# Altium PCB MB_v1.PcbDoc (part 7 of 10)
Units mm, origin at the board's own origin, x right, y up, seen from the top; angles counter-clockwise.
Board outline 203 x 72 mm, 6 copper layers (Top Layer, Layer 3, Layer 1, Layer 2, Layer 4, Bottom Layer), stack 1.52 mm thick; 655 components, 569 nets, 2943 pads, 1834 vias.
Unrouted connection lines stored in the file: 31.
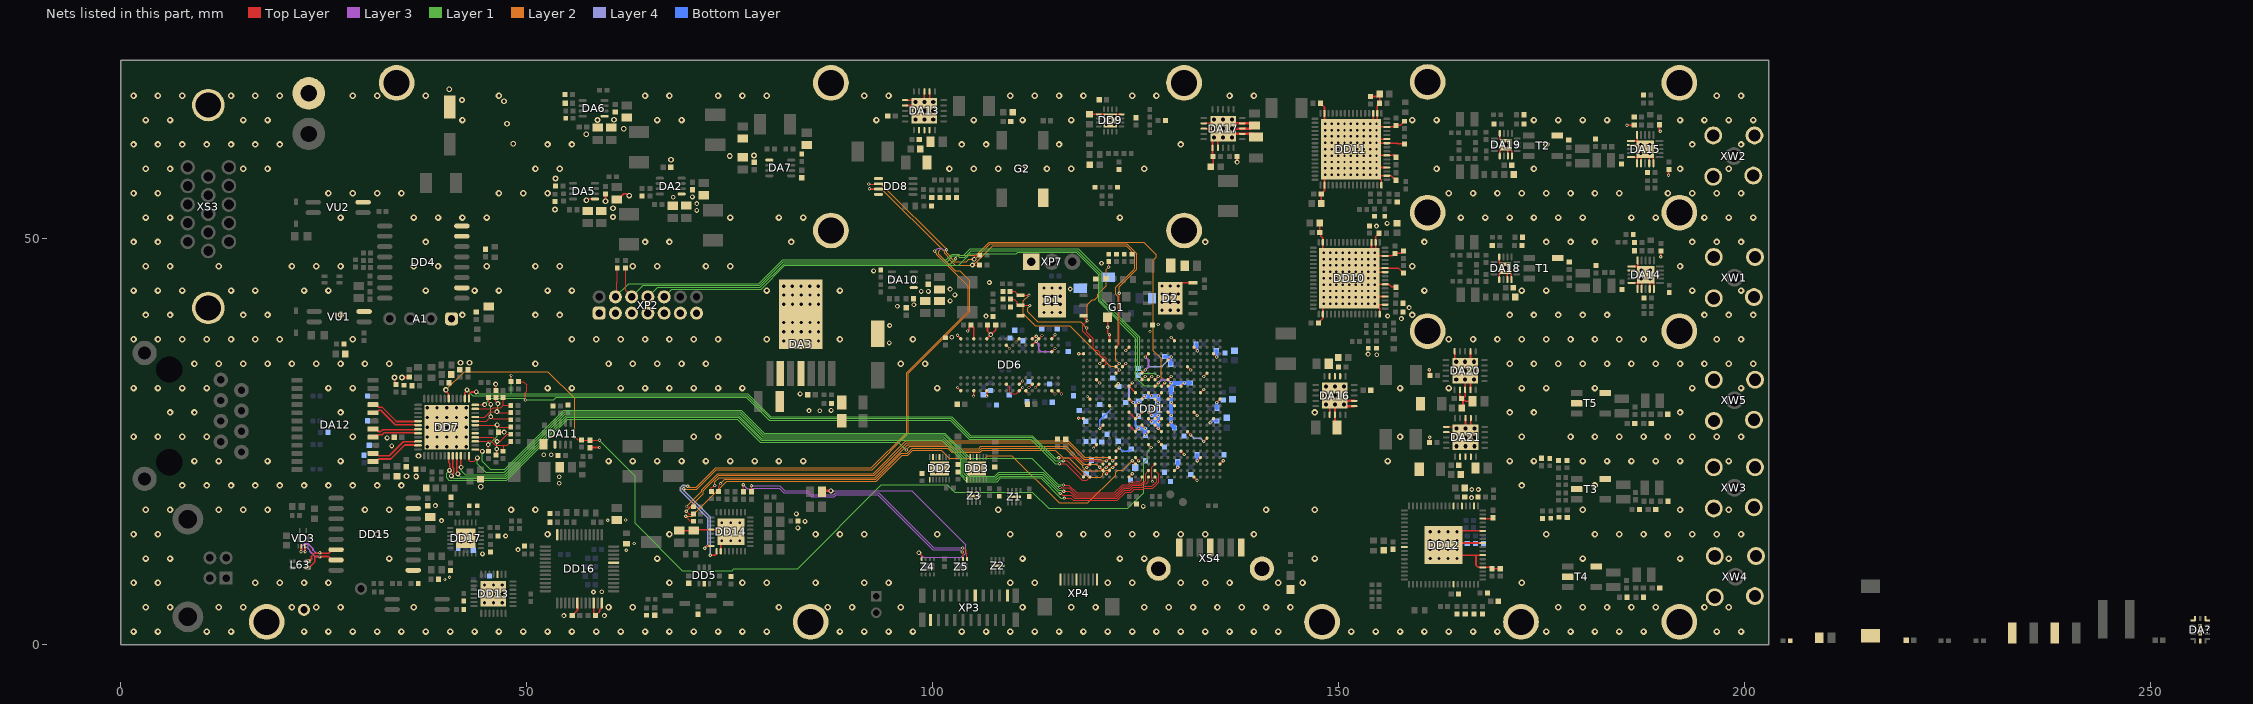
[diagram p10: the nets of this part, all layers, seen from the top]

## Via types
v1: diameter 0.4, hole 0.2, Top Layer to Bottom Layer, tented both sides, 654 vias
v2: diameter 0.8, hole 0.4, Top Layer to Bottom Layer, tented both sides, 489 vias
v3: diameter 0.6, hole 0.3, Top Layer to Bottom Layer, tented both sides, 354 vias
v4: diameter 0.7, hole 0.4, Top Layer to Bottom Layer, tented both sides, 144 vias
v5: diameter 0.8, hole 0.4, Top Layer to Bottom Layer, 87 vias
v6: diameter 0.9, hole 0.5, Top Layer to Bottom Layer, 45 vias
v7: diameter 0.66, hole 0.4, Top Layer to Bottom Layer, 25 vias
v8: diameter 0.7, hole 0.3, Top Layer to Bottom Layer, 13 vias
v9: diameter 0.5, hole 0.2, Top Layer to Bottom Layer, 12 vias
v10: diameter 0.5, hole 0.3, Top Layer to Bottom Layer, 5 vias
v11: diameter 1, hole 0.5, Top Layer to Bottom Layer, 2 vias
v12: diameter 0.4, hole 0.2, Top Layer to Bottom Layer, 2 vias
v13: diameter 0.9, hole 0.4, Top Layer to Bottom Layer, tented both sides, 2 vias

## Nets (pads, with @x,y where several pads share a name; then routed paths per layer and width w, separated by ;. In a path a pad name is that pad's centre, name@x,y a point inside that pad or via, vN(x,y) a via of type N, cw(c..) or ccw(c..) an arc to the next point about the centre after c; other vN are vias at no path point) (continued)
ETH0_TD1_N: DA12.8 DD7.6 | length 6.4
  Top Layer w0.2: DA12.8@31.091,28.551 31.466,28.551 31.766,28.851 32.04,28.851 33.814,27.077 36.236,27.077 36.286,27.027 DD7.6@36.638,27.027
ETH0_TD1_P: DA12.9 DD7.5 | length 6.4
  Top Layer w0.2: DA12.9@31.091,29.551 31.466,29.551 31.766,29.251 32.206,29.251 33.98,27.477 36.236,27.477 36.286,27.527 DD7.5@36.638,27.527
ETH0_TD2_N: DA12.5 DD7.8 | length 5.8
  Top Layer w0.2: DA12.5@31.091,25.551 31.466,25.551 31.766,25.851 32.232,25.851 32.458,26.077 35.181,26.077 36.236,26.077 36.286,26.027 DD7.8@36.638,26.027
ETH0_TD2_P: DA12.6 DD7.7 | length 5.8
  Top Layer w0.2: DA12.6@31.091,26.551 31.466,26.551 31.766,26.251 32.066,26.251 32.292,26.477 35.347,26.477 36.236,26.477 36.286,26.527 DD7.7@36.638,26.527
ETH0_TD3_N: DA12.2 DD7.11 | length 6.4
  Top Layer w0.2: DA12.2@31.091,22.551 31.466,22.551 31.766,22.851 33.265,22.851 34.991,24.577 36.236,24.577 36.286,24.527 DD7.11@36.638,24.527
ETH0_TD3_P: DA12.3 DD7.10 | length 6.4
  Top Layer w0.2: DA12.3@31.091,23.551 31.466,23.551 31.766,23.251 33.099,23.251 34.825,24.977 36.236,24.977 36.286,25.027 DD7.10@36.638,25.027
ETH_INT: DD1.AB1 DD7.38 | length 81.6
  Top Layer w0.125: v1(116.1,22.625) 116.612,22.625 DD1.AB1@118.612,20.625
  Top Layer w0.2: DD7.38@42.413,30.302 42.413,31.029 42.672,31.288 v3(42.672,31.369)
  Layer 1 w0.125: v3(42.672,31.369) 43.389,30.652 53.571,30.652 53.593,30.675 77.182,30.675 80.007,27.85 102.282,27.85 104.607,25.525 112.207,25.525 115.107,22.625 v1(116.1,22.625)
ETH_MDC: DD1.AB2 DD7.36 R79.1 | length 83.9
  Top Layer w0.125: DD7.36@43.688,29.527 43.72,29.559 44.822,29.559 v3(44.831,29.55) ; R79.1@49.025,32.4 49.6,32.4 50,32 50,31.175 49.85,31.025 v1(49.85,30.125) ; v1(115.65,22.262) 116.442,22.262 118.455,20.25 119.037,20.25 DD1.AB2@119.412,20.625
  Layer 1 w0.125: v3(44.831,29.55) 44.831,29.63 45.526,30.325 49.789,30.325 v1@49.92,30.195 ; v1(49.85,30.125) v1@49.92,30.195 ; v1(115.65,22.262) 115.151,22.262 112.114,25.3 104.514,25.3 102.189,27.625 79.914,27.625 77.089,30.45 53.686,30.45 53.361,30.125 49.989,30.125 v1@49.92,30.195
ETH_MDIO: DD1.Y4 DD7.37 R78.1 | length 85.5
  Top Layer w0.125: R78.1@48.075,32.4 48.075,33.125 v1(48.1,33.15) ; v1(115.575,23) 116.108,23 116.121,22.988 116.25,22.988 116.255,22.983 116.512,22.983 116.529,23 118.124,23 118.462,22.662 120.575,22.662 DD1.Y4@121.012,22.225
  Top Layer w0.2: DD7.37@42.913,30.302 42.921,30.31 42.921,30.856 43.18,31.115 v3(43.815,31.115)
  Layer 1 w0.125: v3(43.815,31.115) 43.911,31.115 44.126,30.9 48.1,30.9 ; v1(48.1,33.15) 48.1,30.9 ; v1(115.575,23) 115.05,23 112.3,25.75 104.7,25.75 102.375,28.075 80.1,28.075 77.275,30.9 48.1,30.9
ETH_RST: C155.2 DD1.U11 DD7.42 R70.1 | length 117.3
  Top Layer w0.125: v1(55.925,25.575) 56.285,25.215 R70.1@56.769,25.215 56.824,25.16 C155.2@57.825,25.16 58.973,25.16 v1(58.988,25.175)
  Top Layer w0.2: v4(40.069,31.369) 40.069,31.234 40.394,30.909 40.394,30.321 DD7.42@40.413,30.302 ; DD1.U11@126.612,24.625 126.612,24.619 126.95,24.281 v1(126.95,24.275)
  Layer 1 w0.125: v1(58.988,25.175) 58.988,25.137 63.375,20.75 63.375,14.925 69.195,9.105 75.337,9.105 75.557,9.325 83.389,9.325 93.726,19.663 101.838,19.663 102.725,18.775 112.315,18.775 114.313,16.777 124.077,16.777 126,18.7 126,22.379 126.449,22.828 126.449,23.774 v1(126.95,24.275)
  Layer 2 w0.125: v4(40.069,31.369) 42.312,33.613 52.637,33.613 55.925,30.325 v1(55.925,25.575)
ETH_RXC: DD7.35 R60.1 R75.1 | length 5.5
  Top Layer w0.125: DD7.35@43.688,29.027 44.467,29.027 44.502,29.063 45.754,29.063 45.881,29.19 46.843,29.19 47.117,29.464 ; R75.1@47.117,30.411 47.117,29.464 ; R60.1@48.064,29.464 47.117,29.464
ETH_RXCTL: DD7.33 R65.1 R76.1 | length 6.6
  Top Layer w0.125: DD7.33@43.688,28.027 44.864,28.027 45.539,28.702 46.484,28.702 46.611,28.575 R65.1@48.064,28.575 ; R76.1@46.228,30.411 46.228,29.97 46.482,29.716 v3(46.482,29.677)
  Layer 1 w0.125: v3(46.355,28.702) 46.355,28.831 46.482,28.958 v3(46.482,29.677)
ETH_RXD0: DD7.32 R66.2 R71.1 | length 7.2
  Top Layer w0.125: DD7.32@43.688,27.527 45.039,27.527 45.588,28.076 v3(45.602,28.076) ; R71.1@45.339,30.411 45.339,29.902 45.593,29.648 v3(45.593,29.591) ; v3@45.579,28.067 45.65,28.067 45.904,27.813 47.937,27.813 R66.2@48.064,27.686
  Layer 1 w0.125: v3(45.593,29.591) 45.597,29.587 45.597,28.08 v3(45.602,28.076)
ETH_RXD1: DD7.31 R67.2 R72.1 | length 8.2
  Top Layer w0.125: DD7.31@43.688,27.027 46.352,27.027 v3(46.375,27.05) 46.433,27.05 46.686,26.797 R67.2@48.064,26.797 ; v3(45.289,24.634) 45.289,23.868 R72.1@45.339,23.818
  Layer 1 w0.125: v3(45.289,24.634) 45.335,24.634 46.375,25.674 v3(46.375,27.05)
ETH_RXD2: DD7.28 R68.1 R73.1 | length 6.5
  Top Layer w0.125: DD7.28@43.688,25.527 45.856,25.527 v3(46.369,25.014) 46.389,25.034 46.784,25.034 47.65,25.9 48.056,25.9 R68.1@48.064,25.908 ; R73.1@46.228,23.564 46.304,23.564 46.328,23.587 v3(46.328,24.089)
  Layer 1 w0.125: v3(46.328,24.089) 46.348,24.11 46.348,24.993 v3(46.369,25.014)
ETH_RXD3: DD7.27 R69.1 R74.1 | length 5.6
  Top Layer w0.125: DD7.27@43.688,25.027 45.039,25.027 45.137,25.126 45.604,25.126 46.178,24.552 47.227,24.552 ; R74.1@47.117,23.818 47.227,23.928 47.227,24.552 ; R69.1@48.064,25.019 47.597,24.552 47.227,24.552
ETH_TXC: DD1.AA11 DD7.24 | length 96.2
  Top Layer w0.125: DD7.24@42.913,23.252 42.913,22.679 42.986,22.606 43.561,22.606 v3(43.942,22.987) ; v1(115.712,19.342) 115.765,19.289 116.829,19.289 117.668,18.45 122.51,18.45 123.51,19.45 124.186,19.45 124.561,19.825 125.714,19.825 125.901,20.012 126.062,20.012 126.249,20.199 126.249,21.062 DD1.AA11@126.612,21.425
  Layer 1 w0.125: v3(43.942,22.987) 43.942,22.258 44.975,21.225 47.284,21.225 54.709,28.65 76.343,28.65 79.168,25.825 101.443,25.825 104.15,23.118 104.15,21.125 104.525,20.75 107.7,20.75 108.15,21.2 113.66,21.2 115.38,19.479 115.5,19.479 115.638,19.342 v1(115.712,19.342)
ETH_TXCTL: DD1.AB10 DD7.25 | length 92.1
  Top Layer w0.125: DD7.25@43.688,24.027 44.279,24.027 44.503,23.804 v3(44.572,23.804) ; v1(116.135,19.652) 116.146,19.64 116.796,19.64 117.761,18.675 122.417,18.675 123.417,19.675 124.093,19.675 124.468,20.05 125.525,20.05 125.759,20.284 125.759,20.572 DD1.AB10@125.812,20.625
  Layer 1 w0.125: v3(44.572,23.804) 44.572,22.553 45.55,21.575 47.316,21.575 54.616,28.875 76.436,28.875 79.261,26.05 101.536,26.05 104.636,22.95 112.236,22.95 115.482,19.704 115.862,19.704 115.876,19.691 116.095,19.691 v1(116.135,19.652)
ETH_TXD0: DD1.Y5 DD7.19 | length 91.5
  Top Layer w0.2: DD7.19@40.413,23.252 40.413,22.432 40.53,22.315 40.53,21.48 v3(40.513,21.463) ; v1(121.411,21.824) DD1.Y5@121.812,22.225
  Layer 1 w0.125: v3(40.513,21.463) 40.15,21.1 40.15,20.55 40.45,20.25 47.582,20.25 55.082,27.75 75.97,27.75 78.795,24.925 95.812,24.925 v1(96.777,23.96)
  Layer 2 w0.125: v1(96.777,23.96) 97.217,24.4 101.981,24.4 102.481,23.9 105.793,23.9 106.068,24.175 116.363,24.175 118.5,22.038 118.5,21.821 118.896,21.425 120.802,21.425 121.157,21.779 121.366,21.779 v1(121.411,21.824)
ETH_TXD1: DD1.AA12 DD7.20 | length 101.3
  Top Layer w0.125: v1(116.223,18.04) 117.06,18.04 117.325,17.775 122.789,17.775 123.789,18.775 124.466,18.775 124.841,19.15 125.993,19.15 126.093,19.25 127.121,19.25 127.861,19.991 127.861,20.482 127.85,20.494 127.85,20.775 127.861,20.787 127.861,20.976 DD1.AA12@127.412,21.425
  Top Layer w0.2: v3(40.746,20.773) 40.746,20.881 41.038,21.173 41.038,21.68 40.913,21.805 DD7.20@40.913,23.252
  Layer 1 w0.125: v3(40.746,20.773) 41.044,20.475 47.489,20.475 54.989,27.975 76.063,27.975 78.888,25.15 101.163,25.15 103.475,22.838 103.475,20.845 104.245,20.075 107.98,20.075 108.43,20.525 113.329,20.525 115.814,18.04 v1(116.223,18.04)
ETH_TXD2: DD1.AB12 DD7.21 | length 98.9
  Top Layer w0.125: v1(115.75,18.617) 115.824,18.617 116.039,18.402 117.079,18.402 117.482,18 122.696,18 123.696,19 124.372,19 124.747,19.375 125.9,19.375 126,19.475 127.028,19.475 127.636,20.084 127.636,20.401 DD1.AB12@127.412,20.625
  Top Layer w0.2: DD7.21@41.413,23.252 41.413,21.243 41.552,21.103 v3(41.552,21.026)
  Layer 1 w0.125: v3(41.552,21.026) 41.552,20.995 41.847,20.7 47.396,20.7 54.896,28.2 76.157,28.2 78.982,25.375 101.257,25.375 103.7,22.932 103.7,20.939 104.339,20.3 107.886,20.3 108.336,20.75 113.473,20.75 115.469,18.754 115.539,18.754 115.677,18.617 v1(115.75,18.617)
ETH_TXD3: DD1.AB11 DD7.22 | length 96.9
  Top Layer w0.125: v1(116.183,18.875) 116.925,18.875 117.575,18.225 122.603,18.225 123.603,19.225 124.279,19.225 124.654,19.6 125.807,19.6 125.994,19.787 126.314,19.787 126.612,20.085 DD1.AB11@126.612,20.625
  Top Layer w0.2: DD7.22@41.913,23.252 41.913,21.869 v3(41.938,21.844)
  Layer 1 w0.125: v3(41.938,21.844) 41.945,21.837 41.945,21.43 42.45,20.925 47.302,20.925 54.802,28.425 76.25,28.425 79.075,25.6 101.35,25.6 103.925,23.025 103.925,21.032 104.432,20.525 107.793,20.525 108.243,20.975 113.567,20.975 115.562,18.979 115.908,18.979 115.96,18.928 116.13,18.928 v1(116.183,18.875)
GND: A1.1 C1.1 C2.2 C4.1 C5.1 C8.1 C9.1 C10.1 C11.1 C12.1 C15.1 C16.1 C17.1 C18.1 C19.1 C21.1 C22.1 C23.1 C25.2 C26.2 C30.1 C32.1 C33.1 C34.1 C35.1 C36.1 C37.2 C38.1 C39.1 C40.1 C41.1 C42.1 C43.1 C45.1 C46.1 C47.1 C48.1 C49.1 C50.1 C51.1 C53.1 C55.1 C56.1 C57.1 C59.1 C60.1 C61.1 C62.1 C63.1 C64.1 C65.1 C66.1 C67.1 C68.1 C69.1 C71.1 C75.1 C76.1 C77.1 C78.1 C79.1 C80.1 C81.1 C84.1 C85.1 C86.1 C87.1 C88.1 C89.1 C91.1 C92.1 C93.1 C94.1 C95.1 C96.1 C97.1 C98.1 C99.1 C100.1 C101.1 C102.1 C103.1 C104.1 C105.1 C106.1 C107.1 C108.1 C109.1 C110.1 C111.1 C112.1 C113.1 C114.1 C115.1 C116.1 C117.1 C118.1 C119.1 C120.1 C121.1 C122.2 C123.1 C124.1 C125.1 C126.1 C127.2 C128.1 C129.1 C131.1 C132.1 C133.1 C134.1 C135.1 C136.1 C138.1 C139.1 C140.1 C142.1 C143.1 C144.1 C145.1 C146.1 C147.1 C148.1 C149.1 C150.1 C151.1 C152.1 C153.1 C154.1 C155.1 C156.1 C157.1 C158.1 C159.1 C160.1 C161.1 C162.1 C163.1 C164.1 C165.1 C166.1 C167.1 C168.1 C169.1 C170.1 C171.1 C172.1 C173.2 C174.1 C175.1 C176.1 C177.1 C178.1 C179.1 C180.1 C181.2 C182.1 C183.2 C184.1 C185.1 C186.1 C187.1 C188.1 C189.1 C190.2 C191.1 C192.1 C193.2 C194.1 C195.2 C196.1 C197.1 C198.1 C199.1 C200.1 C202.1 C203.1 C204.1 C205.1 C208.1 C209.2 C210.1 C211.1 C212.1 C215.1 C216.1 C217.1 C218.1 C219.1 C220.1 C221.1 C222.1 C223.1 C224.1 C225.1 C226.1 C227.1 C228.1 C229.1 C230.1 C231.1 C232.1 C233.1 C234.1 C235.1 C236.1 C237.1 C242.1 C245.1 C247.1 C251.1 C252.1 C254.1 C255.1 C256.1 C257.1 C258.1 C259.1 C260.1 C261.1 C262.1 C263.1 C264.1 C265.1 C266.1 C267.1 C269.1 C270.1 C271.1 C272.1 C273.1 C274.1 C275.1 C276.1 C277.1 C278.1 C279.1 C280.1 C281.1 C282.1 C283.1 C284.1 C285.1 C286.1 C287.1 C288.1 C289.1 C290.1 C291.1 C292.1 C293.1 C294.1 C295.1 C296.1 C297.2 C298.1 C299.2 C301.1 C303.1 C306.1 C308.1 C309.1 C314.1 C316.1 C317.1 C320.1 C321.1 C322.1 C327.1 C346.1 C347.2 C348.2 C352.2 C359.1 C?.1@209.236,0.826 C?.1@219.952,0.526 C?.1@233.038,1.426 C?.1@238.263,1.426 C?.2@215.537,1.076 D1.4 D1.9 D2.4 D2.9 DA2.1 DA3.2 DA3.4 DA3.8 DA5.1 DA6.1 DA7.1 DA10.1 DA11.1 DA13.7 DA13.8 DA13.11 DA13.12 DA13.17 DA13.18 DA13.19 DA13.21 DA14.10 DA14.11 DA14.12 DA14.15 DA14.16 DA14.17 DA14.19 DA14.20 DA14.21 DA15.10 DA15.11 DA15.12 DA15.15 DA15.16 DA15.17 DA15.19 DA15.20 DA15.21 DA16.7 DA16.8 DA16.11 DA16.12 DA16.17 DA16.18 DA16.19 DA16.21 DA17.7 DA17.8 DA17.11 DA17.12 DA17.17 DA17.18 DA17.19 DA17.21 DA18.4 DA18.9 DA18.11 DA18.12 DA18.17 DA19.4 DA19.9 DA19.11 DA19.12 DA19.17 DA20.7 DA20.10 DA20.17 DA20.18 DA20.19 DA20.21 DA21.7 DA21.8 DA21.11 DA21.12 DA21.17 DA21.18 DA21.19 DA21.21 DA?.1 DA?.6 DA?.11 DA?.13 DD1.A5 DD1.A15 DD1.AA5 DD1.AA15 DD1.AB8 DD1.AB18 DD1.B8 DD1.B18 DD1.C1 DD1.C11 DD1.C21 DD1.D4 DD1.D14 DD1.E7 DD1.E17 DD1.F10 DD1.F20 DD1.G3 DD1.G10 DD1.H6 DD1.H8 DD1.H12 DD1.H14 DD1.H16 DD1.J9 DD1.J11 DD1.J13 DD1.J19 DD1.K2 DD1.K8 DD1.K10 DD1.K12 DD1.K14 DD1.K22 DD1.L5 DD1.L9 DD1.L12 DD1.L13 DD1.L15 DD1.M8 DD1.M10 DD1.M11 DD1.M14 DD1.M18 DD1.N1 DD1.N9 DD1.N11 DD1.N12 DD1.N13 DD1.N21 DD1.P4 DD1.P8 DD1.P10 DD1.P12 DD1.P14 DD1.R9 DD1.R11 DD1.R13 DD1.R17 DD1.T20 DD1.U3 DD1.U13 DD1.V6 DD1.V16 DD1.W9 DD1.W19 DD1.Y2 DD1.Y12 DD1.Y22 DD2.4 DD2.6 DD2.8 DD2.15 DD3.4 DD3.6 DD3.8 DD3.15 DD4.2 DD4.7 DD4.8 DD5.2 DD6.A9 DD6.B1 DD6.B3 DD6.B9 DD6.D1 DD6.D8 DD6.E1 DD6.E2 DD6.E8 DD6.F9 DD6.G1 DD6.G8 DD6.G9 DD6.J2 DD6.J8 DD6.M1 DD6.M9 DD6.P1 DD6.P9 DD6.T1 DD6.T9 DD7.29 DD7.49 DD8.5 DD8.8 DD9.5 DD9.16 DD9.17 DD10.2 DD10.4 DD10.7 DD10.10 DD10.11 DD10.14 DD10.18 DD10.19 DD10.31 DD10.50 DD10.64 DD10.65 DD11.2 DD11.4 DD11.7 DD11.10 DD11.11 DD11.14 DD11.18 DD11.19 DD11.31 DD11.50 DD11.64 DD11.65 DD12.2 DD12.5 DD12.7 DD12.28 DD12.48 DD12.58 DD12.61 DD12.64 DD12.67 DD12.70 DD12.73 DD13.3 DD13.29 DD14.12 DD14.18 DD14.33 DD15.9 DD15.15 DD16.6 DD16.10 DD16.12 DD16.20 DD16.36 DD17.25 G1.2 G2.2 HL1.2 L56.1 pad.1 R8.2 R9.2 R11.1 R14.2 R16.2 R18.2 R19.1 R29.1 R30.1 R34.1 R36.1 R45.2 R48.2 R51.2 R53.2 R55.2 R57.2 R58.2 R64.2 R76.2 R80.2 R87.2 R94.2 R95.2 R96.1 R97.1 R102.2 R104.2 R106.2 R108.2 R113.2 R114.2 R120.2 R122.2 R126.2 R128.2 R129.2 R130.2 R144.2 R146.2 R147.2 R148.2 R149.2 R150.2 R151.1 R155.2 R156.1 R158.1 R159.1 R161.1 R164.1 R166.1 R167.1 R168.1 R174.1 R177.1 R?.2@205.661,0.476 T1.4 T2.4 T3.2 T3.4 T4.2 T4.4 T5.2 T5.4 VU1.2 VU2.2 XP1.2 XP2.1 XP2.3 XP2.5 XP2.7 XP2.9 XP2.11 XP2.13 XP3.1 XP3.12 XP3.20 XP4.1 XP4.5 XP4.10 XP7.1 XS3.16 XS4.1 XS4.4 XS4.7 XW1.2 XW2.2 XW3.2 XW4.2 XW5.2 Z1.9 Z2.9 Z3.9 | length 309.3
  Top Layer w0.125: C177.1@46.561,26.162 v3(47.244,26.162) ; DD6.J8@109.099,32.068 109.497,31.67 109.497,31.108 109.734,30.87 110.301,30.87 DD6.G9@110.699,31.268 ; v1(127.11,20.07) 127.087,20.093 127.087,20.458 127.024,20.52 127.024,21.837 DD1.Y12@127.412,22.225 ; C292.1@161.229,24.892 161.229,25.529 v1(161.25,25.55) ; DA21.12@163.289,26.177 165.014,26.177 v6(165.664,25.527) ; DA21.11@163.289,26.827 164.364,26.827 v6(164.564,26.627)
  Top Layer w0.2: v4(33.75,32.9) 33.759,32.891 33.759,32.185 C166.1@33.909,32.035 ; v4(34.671,32.893) 35.512,32.893 C176.1@35.56,32.941 ; v3(46.2,32.075) 46.2,31.339 R76.2@46.228,31.311 ; C261.1@55.64,3.575 56.04,3.975 56.04,3.978 56.157,4.095 ; 56.158,4.095 56.275,4.212 DD16.6@56.275,5.125 ; v4(57.375,54.725) 57.51,54.725 57.688,54.903 58.397,54.903 DA5.1@58.426,54.874 ; C155.1@57.825,24.24 57.86,24.275 v1(59,24.275) ; DD16.10@58.275,5.125 58.275,3.81 C251.1@58.51,3.575 59.013,4.078 59.013,4.286 59.275,4.548 DD16.12@59.275,5.125 ; v4(59.725,54.6) 59.725,55.498 C15.1@59.743,55.516 ; C8.1@61.14,54.845 61.29,54.845 61.973,55.528 62.287,55.528 62.515,55.3 v4(62.65,55.3) ; C348.2@68.838,14.035 C347.2@70.616,14.035 70.731,14.15 DD14.12@72.775,14.15 73.825,14.15 v8(74.075,13.9) ; DD14.18@73.925,11.5 73.925,12.65 v8(74.075,12.8) ; DA13.12@96.628,66.402 98.353,66.402 v6(99.003,65.752) ; DA13.11@96.628,67.052 97.703,67.052 v6(97.903,66.852) ; v6(99.003,66.852) DA13.8@99.003,68.127 ; DA13.7@99.653,68.127 99.653,67.227 100.028,66.852 v6(100.103,66.852) ; v1@103.082,38.09 DD6.T1@103.501,37.671 ; v1(103.098,31.669) DD6.T9@103.499,31.268 ; v1(104.35,38.625) 104.35,38.679 104.525,38.854 104.525,39.15 C124.1@104.745,39.37 105.099,39.016 DD6.P1@105.099,37.668 ; v1(105.059,30.607) 105.097,30.645 DD6.P9@105.097,31.27 ; v1(106.698,30.607) 106.698,31.263 DD6.M9@106.701,31.266 ; DD6.M1@106.699,37.668 107.177,38.146 v3(107.177,38.186) ; C125.1@106.777,39.37 106.777,38.591 107.177,38.191 v3(107.177,38.186) ; v3@107.164,38.186 v3(107.177,38.186) ; v3@107.2,38.15 107.793,38.743 C105.1@107.793,39.37 ; DD6.J2@109.099,36.868 v1(109.5,36.467) ; v1(110.298,37.267) DD6.G1@110.699,37.668 ; DD6.G9@110.701,31.266 v1(111.102,31.667) ; DD6.G8@110.701,32.066 v1(111.102,32.467) ; DD6.F9@111.497,31.266 v1(111.899,30.865) ; v1(111.896,31.669) DD6.E8@112.297,32.07 ; DD6.E2@112.301,36.866 112.301,36.874 112.785,37.357 v1(112.785,37.361) ; DD6.E1@112.301,37.666 112.357,37.666 112.617,37.926 112.729,37.926 v1(112.786,37.984) ; v1(112.696,31.669) DD6.D8@113.097,32.07 ; DD6.D1@113.101,37.666 v1(113.502,38.067) ; DD6.B9@114.697,31.266 v1(115.098,30.865) ; DD6.B3@114.701,36.066 v1(115.102,36.467) ; DD6.B1@114.701,37.666 114.701,37.709 115.102,38.11 v1(115.102,38.149) ; DD6.A9@115.497,31.266 v1(115.899,30.865) ; v1(118.001,27.883) 118.03,27.854 118.587,27.854 DD1.N1@118.614,27.827 ; v1(118.023,35.828) 118.025,35.827 DD1.C1@118.61,35.827 ; v1(119.011,21.824) DD1.Y2@119.412,22.225 ; v1(119.086,30.55) 119.408,30.229 DD1.K2@119.412,30.229 ; C200.1@119.359,65.297 119.37,65.308 DD9.5@120.496,65.308 121.146,65.308 v10(121.388,65.066) ; v1(119.835,24.199) 119.835,24.224 120.21,24.598 DD1.U3@120.21,24.627 ; DD1.G3@120.21,32.623 v1(120.611,32.222) ; v1(120.609,26.626) DD1.P4@121.01,27.027 ; v1(120.609,34.626) DD1.D4@121.01,35.027 ; v1(121.411,21.024) DD1.AA5@121.812,21.425 ; G1.2@121.575,40.305 121.575,38.4 121.799,38.176 v1(121.799,38.15) ; DD1.L5@121.81,29.423 121.821,29.423 122.108,29.136 v1(122.115,29.136) ; DD1.A5@121.812,37.425 v1@121.812,38.137 ; v10(122.404,65.066) 122.646,65.308 DD9.16@123.296,65.308 ; DD1.H6@122.612,31.825 v1(122.901,32.114) ; DD1.V6@122.614,23.823 v1(123.015,24.224) ; DD1.E7@123.412,34.225 v1(123.812,34.626) ; v1(123.811,36.224) DD1.B8@124.212,36.625 ; DD1.AB8@124.212,20.625 v1(124.613,21.026) ; DD1.P8@124.212,27.025 DD1.R9@125.012,26.225 v1(125.413,26.626) ; DD1.M8@124.212,28.625 DD1.N9@125.012,27.825 v1(125.413,28.226) DD1.M10@125.812,28.625 ; DD1.K8@124.212,30.225 124.583,29.854 124.687,29.854 v1(124.725,29.816) ; v1(124.613,32.226) DD1.H8@124.212,31.825 DD1.J9@125.012,31.025 ; DD1.W9@125.012,23.025 v1(125.413,22.624) ; DD1.L9@125.012,29.425 v1(125.413,29.826) ; DD1.P10@125.812,27.025 v1(126.213,26.624) ; DD1.K10@125.812,30.225 v1(126.213,30.626) ; DD1.G10@125.812,32.625 v1(126.213,33.026) ; DD1.F10@125.812,33.425 v1(126.213,33.826) ; v1(126.211,25.824) DD1.R11@126.612,26.225 ; v1(126.211,35.424) DD1.C11@126.612,35.825 ; DD1.N11@126.612,27.825 v1(127.013,27.424) ; DD1.M11@126.612,28.625 v1(127.013,28.224) ; DD1.J11@126.612,31.025 v1(127.013,30.624) ; v1(127.013,29.024) v1(127.013,29.024) 127.412,29.424 DD1.L12@127.412,29.425 ; DD1.P12@127.412,27.025 v1@127.811,26.626 ; DD1.N12@127.412,27.825 v1(127.813,28.226) ; DD1.K12@127.412,30.225 v1(127.813,29.824) ; DD1.H12@127.412,31.825 v1(127.813,32.226) ; v1(127.811,27.424) DD1.N13@128.212,27.825 ; v1(127.811,29.024) DD1.L13@128.212,29.425 ; v1(127.811,30.624) DD1.J13@128.212,31.025 ; v1(127.813,26.624) DD1.R13@128.212,26.225 ; v1(127.837,25.026) 127.837,25.013 128.212,24.638 DD1.U13@128.212,24.625 ; DD1.P14@129.012,27.025 v1(129.413,27.426) ; DD1.M14@129.012,28.625 v1(129.413,28.224) ; DD1.K14@129.012,30.225 v1(129.413,30.626) ; DD1.H14@129.012,31.825 v1(129.413,32.226) ; DD1.D14@129.012,35.025 v1(129.413,35.426) ; v1(129.411,29.826) DD1.L15@129.812,29.425 ; v1(129.411,37.826) DD1.A15@129.812,37.425 ; DD1.AA15@129.812,21.425 v1(130.213,21.826) ; v5(130.283,44.172) 130.683,44.572 130.795,44.572 130.8,44.577 D2.4@132.098,44.577 ; DD1.V16@130.612,23.825 v1(131.013,23.424) ; DD1.H16@130.612,31.825 v1(131.013,32.226) ; DD1.R17@131.412,26.225 v1(131.813,25.824) ; DD1.E17@131.412,34.225 v1(131.813,33.824) ; DD1.AB18@132.212,20.625 132.212,20.619 132.587,20.244 v1(132.587,20.238) ; DD1.M18@132.212,28.625 v1(132.613,28.224) ; DD1.B18@132.212,36.625 132.22,36.625 132.648,36.197 v1(132.655,36.197) ; v1(132.611,22.624) DD1.W19@133.012,23.025 ; DD1.J19@133.012,31.025 v1(133.413,31.426) ; v1(133.411,25.024) DD1.T20@133.812,25.425 ; v1(133.411,33.024) DD1.F20@133.812,33.425 ; DA17.8@133.426,63.556 v6(134.701,63.556) ; DA17.7@133.426,64.206 135.151,64.206 v6(135.801,63.556) ; v1(134.203,27.337) 134.203,27.376 134.612,27.786 DD1.N21@134.612,27.825 ; C221.1@134.312,58.857 134.579,59.124 C223.1@134.579,60.127 134.501,60.205 DA17.11@134.501,61.181 134.501,62.256 v6(134.701,62.456) ; DD1.C21@134.612,35.825 v1(135.013,35.424) ; DA17.21@134.776,62.456 135.151,62.081 DA17.12@135.151,61.181 ; v1(135.011,29.824) DD1.K22@135.412,30.225 ; DD1.Y22@135.412,22.225 v1(135.813,22.626) ; C267.1@147.544,39.624 148.092,40.172 DD10.50@148.092,40.698 148.092,41.792 148.192,41.892 DD10.65@148.192,41.974 ; C256.1@147.689,51.925 147.71,51.904 C262.1@147.71,50.75 147.85,50.61 147.85,50.325 148.092,50.083 DD10.31@148.092,49.548 148.092,48.454 148.192,48.354 DD10.65@148.192,48.273 ; C269.1@147.798,66.675 148.299,66.174 DD11.31@148.299,65.437 DD11.65@148.299,64.262 ; C259.1@147.9,54.35 C263.1@147.9,55.501 148.299,55.9 DD11.50@148.299,56.587 148.299,57.681 148.399,57.781 DD11.65@148.399,57.862 ; DA16.21@148.558,29.577 148.933,29.202 DA16.7@148.933,28.302 ; v6(149.583,29.577) DA16.8@149.583,28.302 149.583,26.967 C217.1@149.825,26.725 ; DD10.65@152.592,46.373 DD10.11@155.767,46.373 157.411,46.373 R102.2@158.006,45.778 ; DD11.65@152.799,62.262 DD11.11@155.974,62.262 ; DD10.65@153.704,47.485 154.092,47.873 DD10.14@155.767,47.873 156.682,47.873 C264.1@156.99,48.181 157.731,48.181 R104.2@158.006,48.456 ; DD10.65@153.704,48.273 154.092,48.66 DD10.19@154.092,49.548 ; R130.2@153.942,67.506 154.806,67.506 C245.1@155.087,67.787 ; DD11.19@154.299,65.437 154.299,63.762 DD11.14@155.974,63.762 156.95,63.762 C252.1@157.117,63.929 157.133,63.945 157.62,63.945 R108.2@158.133,64.458 ; DD10.65@154.491,42.761 154.572,42.761 154.685,42.873 DD10.4@155.767,42.873 ; DD10.65@154.491,44.336 154.529,44.373 DD10.7@155.767,44.373 155.778,44.362 156.263,44.362 156.55,44.075 157.063,44.075 C266.1@157.117,44.021 ; DD10.65@154.491,45.91 154.529,45.873 DD10.10@155.767,45.873 ; DD10.65@154.491,48.273 154.491,48.354 154.592,48.454 DD10.18@154.592,49.548 154.592,50.259 C260.1@155.006,50.673 ; DD10.65@154.632,41.833 155.092,41.373 DD10.64@155.092,40.698 ; DD10.65@154.673,41.873 DD10.2@155.767,41.873 ; DD11.65@154.699,58.65 154.78,58.65 154.892,58.762 DD11.4@155.974,58.762 ; DD11.65@154.699,60.262 DD11.7@155.974,60.262 156.878,60.262 C265.1@157.117,60.023 ; DD11.65@154.699,61.762 DD11.10@155.974,61.762 157.238,61.762 157.325,61.675 158.111,61.675 R106.2@158.133,61.653 ; DD11.65@154.699,64.162 154.699,64.243 154.799,64.343 DD11.18@154.799,65.437 154.799,66.387 C247.1@155.087,66.675 C245.1@155.087,67.787 ; C245.1@155.1,67.8 C245.1@155.087,67.787 ; DD11.64@155.299,56.587 155.299,57.262 DD11.65@154.699,57.862 154.78,57.862 154.88,57.762 DD11.2@155.974,57.762 156.488,57.762 156.832,57.418 156.897,57.418 C257.1@157.117,57.198 ; v1(161.2,33.85) 161.2,33.796 161.259,33.737 161.259,33.165 C278.1@161.277,33.147 ; v5(163.51,11.709) 164.21,11.009 167.043,11.009 ; DA20.10@164.326,36.114 164.326,35.039 v6(164.526,34.839) ; DD12.73@164.61,12.509 DD12.64@167.785,12.509 ; v5(164.61,13.909) 164.71,14.009 DD12.67@167.785,14.009 ; DA20.17@164.976,31.364 164.976,30.65 C272.1@165.354,30.272 ; C271.1@165.367,29.129 165.354,29.142 C272.1@165.354,30.272 ; v6(165.626,32.639) DA20.18@165.626,31.364 165.626,30.544 C272.1@165.354,30.272 ; v6(165.626,33.739) 166.276,34.389 DA20.7@166.276,36.114 ; v6(165.664,25.527) 166.314,26.177 DA21.7@166.314,27.902 ; v6(165.664,26.627) DA21.8@165.664,27.902 ; DA20.19@166.276,31.364 166.276,32.264 166.651,32.639 v6(166.726,32.639) ; C280.1@166.625,29.95 C280.1@166.525,29.95 165.676,29.95 C272.1@165.354,30.272 ; DD12.61@167.785,11.009 167.043,11.009 ; DD12.70@167.785,15.509 168.943,15.509 C294.1@169.055,15.621 ; DA18.9@169.821,44.955 169.821,45.605 v11(170.571,46.355) 169.821,47.105 DA18.4@169.821,47.755 ; DA19.9@169.881,60.168 169.881,60.818 v11(170.631,61.568) 169.881,62.318 DA19.4@169.881,62.968 ; C290.1@169.944,9.35 C295.1@168.928,9.35 168.769,9.509 DD12.58@167.785,9.509 167.216,9.509 166.95,9.775 166.95,10.916 167.043,11.009 ; DA18.11@170.821,44.955 170.821,46.105 171.321,45.605 DA18.12@171.321,44.955 ; DA19.11@170.881,60.168 170.881,61.318 171.381,60.818 DA19.12@171.381,60.168 ; v1(185.55,63.975) 186.429,63.975 C199.1@186.439,63.984 ; DA15.15@186.046,60.035 DA15.21@186.796,60.035 ; DA15.12@186.046,61.535 187.196,61.535 v5(187.246,61.585) ; DA15.11@186.046,62.035 186.796,62.035 DA15.10@186.796,62.785 ; DA14.15@186.109,44.565 DA14.21@186.859,44.565 ; DA14.12@186.109,46.065 187.259,46.065 v5(187.309,46.115) ; DA14.11@186.109,46.565 186.859,46.565 DA14.10@186.859,47.315 ; DA15.16@186.796,59.285 DA15.21@186.796,60.035 ; DA14.16@186.859,43.815 DA14.21@186.859,44.565 ; DA15.17@187.296,59.285 187.296,60.435 v5(187.246,60.485) DA15.21@186.821,60.06 ; DA14.17@187.359,43.815 187.359,44.965 v5(187.309,45.015) DA14.21@186.884,44.59 ; DA15.19@188.296,59.285 188.296,60.435 v5(188.346,60.485) 188.796,60.035 DA15.20@188.796,59.285 ; DA14.19@188.359,43.815 188.359,44.965 v5(188.409,45.015) 188.859,44.565 DA14.20@188.859,43.815 ; C189.1@189.566,64.032 189.55,64.017 189.55,63.397 189.658,63.289 v1(189.658,63.235) ; v1(189.722,47.765) 189.722,48.456 C188.1@189.748,48.483 ; v1(190.675,57.8) 190.675,58.49 R97.1@190.709,58.523 ; DA15.21@186.796,60.035 DA15.21@186.821,60.06 ; DA15.21@186.796,60.035 DA15.21@186.821,60.06 ; DA14.21@186.859,44.565 DA14.21@186.884,44.59 ; DA14.21@186.859,44.565 DA14.21@186.884,44.59
  Top Layer w0.3: v6(135.801,63.556) 136.451,64.206 DA17.19@138.176,64.206 139.394,64.206 C235.1@139.675,63.925 139.525,63.925 139.156,63.556 DA17.18@138.176,63.556 v6(136.901,63.556) ; v6(136.901,62.456) 136.901,62.495 137.312,62.906 DA17.17@138.176,62.906 139.494,62.906 C219.1@139.875,62.525 ; v3(137.525,59.425) 137.528,59.428 137.528,60.124 C231.1@137.531,60.127 ; v6(149.583,30.677) 150.233,30.027 DA16.12@151.958,30.027 ; v6(150.683,29.577) 150.883,29.377 DA16.11@151.958,29.377
  Layer 3 w0.2: v1(112.785,37.361) 112.785,37.307 113.102,36.989 113.102,36.302 113.337,36.067 114.702,36.067 v1(115.102,36.467) ; v1(126.211,35.424) 126.611,35.024 126.611,34.224 v1(126.213,33.826) ; v1(127.813,32.226) 128.213,32.626 129.013,32.626 v1(129.413,32.226)
  Layer 4 w0.2: v1(124.613,32.226) 124.213,31.826 124.213,30.327 v1(124.725,29.816) 124.725,29.761 125.013,29.473 125.013,28.626 v1(125.413,28.226) ; v1(126.213,33.826) 126.613,34.226 128.213,34.226 v1(129.413,35.426) ; v1(127.813,32.226) 128.213,32.626 129.013,32.626 v1(129.413,32.226) ; v1(131.813,25.824) 132.213,25.424 133.011,25.424 v1(133.411,25.024)
  Bottom Layer w0.2: v1(120.609,26.626) 120.609,27.629 v1(122.115,29.136) ; v1(123.015,24.224) 123.413,23.826 123.979,23.826 124.004,23.852 124.262,23.852 C62.1@124.482,24.072 ; v1(125.413,26.626) 125.358,26.626 C56.1@125.318,26.666 125.013,26.971 125.013,27.819 C60.1@125.413,28.219
  Bottom Layer w0.4: v1@124.736,29.826 v1(125.413,29.826) v1(126.213,30.626) ; v1(127.813,26.624) v1@127.813,27.421 ; C69.1@128.61,35.475 128.659,35.426 v1(129.413,35.426) 129.365,35.378 C159.1@129.365,34.525 ; v1(130.213,21.826) 130.213,22.504 C139.1@130.225,22.515 ; C138.1@132.463,37.037 132.583,36.917 132.583,36.269 v1(132.655,36.197) ; C150.1@132.589,23.37 132.589,22.645 v1(132.611,22.624) ; v1(134.203,27.337) 134.51,27.645 134.91,27.645 C152.1@135.024,27.53 ; C142.1@134.95,36.215 135.013,36.151 v1(135.013,35.424) ; v1(135.011,29.824) 135.011,29.124 C157.1@135.035,29.1
  Bottom Layer w0.5: v1(125.413,26.626) 125.416,26.624 v1(126.213,26.624) 126.213,25.826 v1(126.211,25.824) ; v1(126.213,30.626) 126.216,30.624 v1(127.013,30.624) v1(127.811,30.624) 127.813,30.621 v1(127.813,29.824) v1(127.813,28.226) ; v1(127.013,27.424) v1(127.811,27.424) ; v1(127.013,28.224) 127.016,28.226 v1(127.813,28.226) ; v1(127.013,29.024) v1(127.811,29.024) ; v1@127.813,27.421 v1(127.811,27.424) ; C147.1@129.812,26.685 129.413,27.084 v1(129.413,27.426) v1(129.413,28.224) v1(129.413,30.626) v1(129.413,32.226) v1(131.013,32.226) 131.75,32.226 C151.1@131.754,32.223 ; v1(127.811,27.424) 127.811,28.224 v1(127.813,28.226)
  other v1: 39.95,8.025 40.525,8.3 62.275,11.625 63.275,12.45 60,15.3 62.225,15.35 103.082,38.094 126.8,38.55 121.588,39.088 127.813,39.423
  other v2: 1.6,1.6 4.6,1.6 10.6,1.6 13.6,1.6 22.6,1.6 25.6,1.6 28.6,1.6 31.6,1.6 34.6,1.6 37.6,1.6 40.6,1.6 43.6,1.6 46.6,1.6 49.6,1.6 52.6,1.6 55.6,1.6 58.6,1.6 61.6,1.6 64.6,1.6 67.6,1.6 70.6,1.6 73.6,1.6 76.6,1.6 79.6,1.6 88.6,1.6 91.6,1.6 94.6,1.6 97.6,1.6 103.6,1.6 106.6,1.6 109.6,1.6 112.6,1.6 115.6,1.6 118.6,1.6 121.6,1.6 124.6,1.6 127.6,1.6 130.6,1.6 133.6,1.6 136.6,1.6 139.6,1.6 142.6,1.6 151.6,1.6 154.6,1.6 157.6,1.6 160.6,1.6 163.6,1.6 166.6,1.6 169.6,1.6 175.6,1.6 178.6,1.6 181.6,1.6 184.6,1.6 187.6,1.6 196.6,1.6 199.6,1.6 3.1,4.6 6.1,4.6 12.1,4.6 15.1,4.6 21.1,4.6 24.1,4.6 27.1,4.6 36.1,4.6 60.1,4.6 63.1,4.6 81.1,4.6 87.1,4.6 90.1,4.6 96.1,4.6 111.1,4.6 117.1,4.6 120.1,4.6 126.1,4.6 129.1,4.6 132.1,4.6 135.1,4.6 138.1,4.6 141.1,4.6 144.1,4.6 177.1,4.6 180.1,4.6 183.1,4.6 186.1,4.6 189.1,4.6 195.1,4.6 198.1,4.6 1.6,7.6 4.6,7.6 16.6,7.6 19.6,7.6 22.6,7.6 25.6,7.6 67.6,7.6 76.6,7.6 79.6,7.6 85.6,7.6 91.6,7.6 94.6,7.6 109.6,7.6 112.6,7.6 121.6,7.6 124.6,7.6 130.6,7.6 133.6,7.6 136.6,7.6 142.6,7.6 145.6,7.6 172.6,7.6 3.1,10.6 6.1,10.6 33.1,10.6 66.1,10.6 111.1,10.6 123.1,10.6 126.1,10.6 147.1,10.6 180.1,10.6 192.1,10.6 198.1,10.6 1.6,13.6 4.6,13.6 31.6,13.6 52.6,13.6 67.6,13.6 85.6,13.6 88.6,13.6 91.6,13.6 100.6,13.6 109.6,13.6 115.6,13.6 118.6,13.6 121.6,13.6 124.6,13.6 127.6,13.6 130.6,13.6 133.6,13.6 139.6,13.6 175.6,13.6 181.6,13.6 184.6,13.6 187.6,13.6 190.6,13.6 193.6,13.6 196.6,13.6 199.6,13.6 3.1,16.6 6.1,16.6 12.1,16.6 15.1,16.6 18.1,16.6 30.1,16.6 33.1,16.6 48.1,16.6 51.1,16.6 108.1,16.6 141.1,16.6 147.1,16.6 180.1,16.6 192.1,16.6 198.1,16.6 7.6,19.6 10.6,19.6 13.6,19.6 16.6,19.6 19.6,19.6 22.6,19.6 25.6,19.6 28.6,19.6 31.6,19.6 34.6,19.6 172.6,19.6 181.6,19.6 9.1,22.6 12.1,22.6 18.1,22.6 27.1,22.6 60.1,22.6 63.1,22.6 66.1,22.6 69.1,22.6 72.1,22.6 75.1,22.6 78.1,22.6 81.1,22.6 84.1,22.6 156.1,22.6 171.1,22.6 174.1,22.6 180.1,22.6 183.1,22.6 186.1,22.6 189.1,22.6 192.1,22.6 198.1,22.6 1.6,25.6 4.6,25.6 7.6,25.6 10.6,25.6 28.6,25.6 70.6,25.6 73.6,25.6 157.6,25.6 172.6,25.6 178.6,25.6 181.6,25.6 184.6,25.6 187.6,25.6 190.6,25.6 193.6,25.6 196.6,25.6 199.6,25.6 6.1,28.6 9.1,28.6 27.1,28.6 147.1,28.6 171.1,28.6 174.1,28.6 192.1,28.6 1.6,31.6 4.6,31.6 7.6,31.6 10.6,31.6 25.6,31.6 28.6,31.6 52.6,31.6 55.6,31.6 61.6,31.6 64.6,31.6 67.6,31.6 70.6,31.6 73.6,31.6 76.6,31.6 100.6,31.6 157.6,31.6 163.6,31.6 172.6,31.6 175.6,31.6 181.6,31.6 193.6,31.6 199.6,31.6 9.1,34.6 12.1,34.6 15.1,34.6 18.1,34.6 21.1,34.6 24.1,34.6 27.1,34.6 30.1,34.6 33.1,34.6 51.1,34.6 60.1,34.6 63.1,34.6 66.1,34.6 69.1,34.6 72.1,34.6 96.1,34.6 99.1,34.6 171.1,34.6 174.1,34.6 177.1,34.6 180.1,34.6 183.1,34.6 186.1,34.6 189.1,34.6 192.1,34.6 195.1,34.6 198.1,34.6 201.1,34.6 1.6,37.6 4.6,37.6 7.6,37.6 10.6,37.6 13.6,37.6 16.6,37.6 19.6,37.6 28.6,37.6 55.6,37.6 58.6,37.6 61.6,37.6 64.6,37.6 67.6,37.6 70.6,37.6 73.6,37.6 79.6,37.6 88.6,37.6 97.6,37.6 163.6,37.6 166.6,37.6 169.6,37.6 172.6,37.6 175.6,37.6 178.6,37.6 181.6,37.6 184.6,37.6 187.6,37.6 196.6,37.6 199.6,37.6 3.1,40.6 6.1,40.6 15.1,40.6 18.1,40.6 27.1,40.6 42.1,40.6 51.1,40.6 54.1,40.6 159.1,40.6 171.1,40.6 174.1,40.6 177.1,40.6 180.1,40.6 183.1,40.6 195.1,40.6 198.1,40.6 201.1,40.6 1.6,43.6 4.6,43.6 7.6,43.6 13.6,43.6 16.6,43.6 22.6,43.6 25.6,43.6 37.6,43.6 43.6,43.6 46.6,43.6 52.6,43.6 55.6,43.6 79.6,43.6 88.6,43.6 160.6,43.6 172.6,43.6 175.6,43.6 193.6,43.6 199.6,43.6 3.1,46.6 6.1,46.6 12.1,46.6 21.1,46.6 24.1,46.6 27.1,46.6 36.1,46.6 39.1,46.6 45.1,46.6 51.1,46.6 54.1,46.6 63.1,46.6 66.1,46.6 72.1,46.6 75.1,46.6 159.1,46.6 192.1,46.6 1.6,49.6 4.6,49.6 37.6,49.6 64.6,49.6 67.6,49.6 82.6,49.6 133.6,49.6 160.6,49.6 175.6,49.6 178.6,49.6 181.6,49.6 193.6,49.6 196.6,49.6 199.6,49.6 3.1,52.6 6.1,52.6 27.1,52.6 36.1,52.6 39.1,52.6 42.1,52.6 45.1,52.6 75.1,52.6 81.1,52.6 84.1,52.6 123.1,52.6 165.1,52.6 168.1,52.6 171.1,52.6 174.1,52.6 177.1,52.6 180.1,52.6 186.1,52.6 189.1,52.6 195.1,52.6 198.1,52.6 201.1,52.6 1.6,55.6 4.6,55.6 25.6,55.6 28.6,55.6 31.6,55.6 34.6,55.6 46.6,55.6 49.6,55.6 52.6,55.6 163.6,55.6 166.6,55.6 169.6,55.6 172.6,55.6 175.6,55.6 178.6,55.6 181.6,55.6 184.6,55.6 190.6,55.6 193.6,55.6 196.6,55.6 199.6,55.6 3.1,58.6 6.1,58.6 15.1,58.6 18.1,58.6 51.1,58.6 54.1,58.6 102.1,58.6 105.1,58.6 108.1,58.6 111.1,58.6 114.1,58.6 117.1,58.6 126.1,58.6 162.1,58.6 174.1,58.6 192.1,58.6 198.1,58.6 1.6,61.6 4.6,61.6 7.6,61.6 10.6,61.6 13.6,61.6 16.6,61.6 19.6,61.6 52.6,61.6 55.6,61.6 103.6,61.6 106.6,61.6 115.6,61.6 130.6,61.6 175.6,61.6 193.6,61.6 199.6,61.6 3.1,64.6 6.1,64.6 15.1,64.6 18.1,64.6 42.1,64.6 66.1,64.6 69.1,64.6 93.1,64.6 105.1,64.6 111.1,64.6 117.1,64.6 159.1,64.6 162.1,64.6 174.1,64.6 177.1,64.6 180.1,64.6 183.1,64.6 192.1,64.6 195.1,64.6 198.1,64.6 201.1,64.6 1.6,67.6 4.6,67.6 7.6,67.6 13.6,67.6 16.6,67.6 19.6,67.6 28.6,67.6 31.6,67.6 37.6,67.6 46.6,67.6 64.6,67.6 67.6,67.6 73.6,67.6 76.6,67.6 79.6,67.6 91.6,67.6 94.6,67.6 109.6,67.6 112.6,67.6 115.6,67.6 118.6,67.6 124.6,67.6 127.6,67.6 136.6,67.6 139.6,67.6 196.6,67.6 199.6,67.6
  other v3: 54.6,3.575 59.6,3.575 58.25,6.475 59.275,6.5 44.575,11.175 48.95,11.7 47.425,13.375 83.425,14.375 84.3,15.175 39.525,15.275 83.25,16.1 125.975,17.025 38.775,17.125 166.4,18.1 166.425,19.1 167.25,19.1 54.028,19.876 54.028,20.676 52.125,23.375 53.05,23.375 33.4,24.475 32.825,25.45 86.125,28.8 84.8,28.825 87.525,28.85 83.7,30.875 154.725,35.7 153.675,35.775 94.675,37.15 102.375,37.85 94.725,39.3 157.775,40.15 106.6,40.45 156.075,40.475 158.725,41.512 95.675,41.675 97.725,41.85 102.175,42.325 102.775,43.075 98.625,43.5 99.5,43.5 102.175,43.775 116.975,43.8 107.025,44.6 92.75,46.037 120.825,46.975 154.7,51.55 156,51.875 70.975,53.475 70.975,54.325 68.075,55.1 70.425,55.15
  other v4: 44.375,19.45 36.4,20.7 35.225,20.725 36.689,23.239 41.875,34.7 42.975,34.7 60.65,52.675 53.5,53.6 60.65,53.75 53.575,57.4 67.8,59.725 75.025,60.175 78.025,60.25 48.375,61.7 57.35,62.85 61.975,63.55 47.6,64.15 58.753,64.625 60.775,64.65 47.225,66.925 42.05,67.075 40.475,68.4
  other v5: 44.825,5.15 45.925,5.15 47.025,5.15 44.825,6.25 45.925,6.25 47.025,6.25 44.825,7.35 45.925,7.35 47.025,7.35 161.31,10.609 162.41,10.609 163.51,10.609 164.61,10.609 161.31,11.709 162.41,11.709 164.61,11.709 161.31,12.809 162.41,12.809 163.51,12.809 164.61,12.809 161.31,13.909 162.41,13.909 163.51,13.909 81.699,37.401 82.767,37.401 83.836,37.401 84.905,37.401 85.973,37.401 81.699,38.53 82.767,38.53 83.836,38.53 84.905,38.53 85.973,38.53 81.699,39.659 82.767,39.659 83.836,39.659 84.905,39.659 85.973,39.659 113.73,40.91 114.73,40.91 115.73,40.91 128.283,41.172 129.283,41.172 130.283,41.172 81.699,41.918 82.767,41.918 83.836,41.918 84.905,41.918 85.973,41.918 113.73,41.91 114.73,41.91 115.73,41.91 128.283,42.172 129.283,42.172 130.283,42.172 113.73,42.91 114.73,42.91 115.73,42.91 81.699,43.047 82.767,43.047 83.836,43.047 84.905,43.047 85.973,43.047 128.283,43.172 129.283,43.172 130.283,43.172 113.73,43.91 114.73,43.91 115.73,43.91 81.674,44.126 82.742,44.126 83.811,44.126 84.88,44.126 85.948,44.126 128.283,44.172 129.283,44.172 188.409,46.115 188.346,61.585
  other v6: 164.564,24.427 165.664,24.427 166.764,24.427 164.564,25.527 166.764,25.527 166.764,26.627 148.483,29.577 148.483,30.677 150.683,30.677 148.483,31.777 149.583,31.777 150.683,31.777 164.526,32.639 164.526,33.739 166.726,33.739 165.626,34.839 166.726,34.839 135.801,62.456 97.903,64.652 99.003,64.652 100.103,64.652 134.701,64.656 135.801,64.656 136.901,64.656 97.903,65.752 100.103,65.752
  other v7: 37.763,24.377 38.963,24.377 40.163,24.377 41.363,24.377 42.563,24.377 37.763,25.577 38.963,25.577 40.163,25.577 41.363,25.577 42.563,25.577 37.763,26.777 38.963,26.777 40.163,26.777 41.363,26.777 42.563,26.777 37.763,27.977 38.963,27.977 40.163,27.977 41.363,27.977 42.563,27.977 37.763,29.177 38.963,29.177 40.163,29.177 41.363,29.177 42.563,29.177
  other v8: 41.95,12.575 43.05,12.575 75.175,12.8 76.275,12.8 41.95,13.675 43.05,13.675 75.175,13.9 76.275,13.9 74.075,15 75.175,15 76.275,15
  other v9: 100.375,21.2 101.375,21.2 104.947,21.2 105.947,21.2 100.375,22.2 101.375,22.2 104.947,22.2 105.947,22.2
  other v10: 121.388,64.05 122.404,64.05 121.896,64.558
I2C_SCL_3V3: DD1.B6 DD8.6 DD14.16 R32.2 | length 123.5
  Top Layer w0.125: v1(92.15,56.725) 93.325,56.725 DD8.6@93.355,56.755 ; v3(105.136,47.464) 105.227,47.555 105.227,47.839 105.337,47.95 R32.2@105.825,47.95 ; DD1.B6@122.612,36.625 123,37.013 v1(123,43.275)
  Top Layer w0.2: v1(71.95,11.875) 72.225,12.15 DD14.16@72.775,12.15
  Layer 3 w0.125: v1(100.3,48.475) 100.316,48.475 100.634,48.794 101.077,48.794 101.227,48.644 v1(101.744,48.644)
  Layer 2 w0.125: v1(69.85,19.488) 69.923,19.488 70.061,19.35 70.882,19.35 73.282,21.75 92.464,21.75 96.825,26.111 96.825,33.493 104.4,41.068 104.4,44.131 100.537,47.994 100.537,48.164 100.3,48.402 v1(100.3,48.475) ; v1(92.15,56.725) 93.725,56.725 101.744,48.706 v1(101.744,48.644) 101.751,48.636 101.751,48.249 102.298,47.703 102.298,47.556 102.704,47.15 104.19,47.15 104.504,47.464 104.925,47.464 v3@105.136,47.675 ; v3(105.136,47.464) v3@105.136,47.675 ; v1(123,43.275) 123,44.069 125.163,46.232 125.163,48.131 123.943,49.35 107.093,49.35 105.327,47.584 105.227,47.584 v3@105.136,47.675
  Layer 4 w0.2: v1(69.85,19.488) 69.812,19.526 69.602,19.526 69.541,19.587 69.209,19.587 68.975,19.353 68.975,18.93 72.325,15.58 72.325,12.25 v1(71.95,11.875)
I2C_SDA_3V3: DD1.E6 DD8.7 DD14.17 R31.2 | length 124.8
  Top Layer w0.125: v1(92.25,56.15) 92.295,56.105 DD8.7@93.355,56.105 ; v3(104.925,46.75) 105.791,46.75 R31.2@105.8,46.741
  Top Layer w0.2: v1(72.625,11) 73.205,11 73.425,11.22 DD14.17@73.425,11.5 ; DD1.E6@122.612,34.225 v1(123.013,34.626)
  Layer 2 w0.125: v1(69.375,19.188) 69.428,19.135 69.69,19.135 69.7,19.125 70.975,19.125 73.375,21.525 92.557,21.525 97.05,26.018 97.05,33.4 104.625,40.975 104.625,44.8 103.363,46.062 102.787,46.062 100.762,48.087 100.762,48.462 101.088,48.787 ; v1(92.25,56.15) 93.725,56.15 101.088,48.787 ; v3(104.925,46.75) 102.786,46.75 102.073,47.463 102.073,47.61 101.487,48.195 101.487,48.388 101.088,48.787 ; v3@104.937,46.737 105.041,46.737 105.305,47.002 105.327,47.002 107.45,49.125 123.85,49.125 124.938,48.037 124.938,46.325 124.725,46.112 122.612,43.999 122.612,43.125 122.875,42.862 122.875,36.891 122.612,36.628 122.612,35.028 v1(123.013,34.626)
  Layer 4 w0.2: v1(69.375,19.188) 69.412,19.15 69.412,18.918 72.625,15.705 v1(72.625,11)
I2S1BCLK: DD1.AA4 R185.1 | length 52.7
  Top Layer w0.125: R185.1@72.775,18.861 72.775,19.375 72.859,19.459 72.984,19.459 73.125,19.6 v1(73.2,19.6)
  Top Layer w0.2: v1(120.611,21.826) DD1.AA4@121.012,21.425
  Layer 2 w0.125: v1(73.2,19.6) 73.2,20.05 73.725,20.575 92.88,20.575 96.93,24.625 102.074,24.625 102.574,24.125 105.7,24.125 105.975,24.4 116.456,24.4 118.656,22.2 120.237,22.2 v1(120.611,21.826)
I2S1DATA0: DD1.W6 R186.1 | length 58.4
  Top Layer w0.125: v1(69.7,17) 69.732,16.968 R186.1@70.547,16.968
  Top Layer w0.2: v1(122.211,22.624) DD1.W6@122.612,23.025
  Layer 2 w0.125: v1(69.7,17) 71.575,18.875 71.575,19.061 73.564,21.05 92.718,21.05 96.743,25.075 116.736,25.075 118.747,23.064 121.77,23.064 v1(122.211,22.624)
I2S1DATA1: DD1.W5 R187.1 | length 58
  Top Layer w0.125: v1(69.675,16.425) 70.021,16.079 R187.1@70.547,16.079
  Top Layer w0.2: v1(121.411,22.624) DD1.W5@121.812,23.025
  Layer 2 w0.125: v1(69.675,16.425) 71.8,18.55 71.8,18.968 73.657,20.825 92.811,20.825 96.836,24.85 116.642,24.85 118.653,22.839 120.684,22.839 120.9,22.624 v1(121.411,22.624)
I2S1MCLK: DD1.Y9 R188.1 | length 65.5
  Top Layer w0.125: v1(69.6,15.8) 70.133,15.267 70.47,15.267 R188.1@70.547,15.19
  Top Layer w0.2: v1(124.611,22.626) DD1.Y9@125.012,22.225
  Layer 2 w0.125: v1(69.6,15.8) 70.375,15.8 74.663,20.088 92.394,20.088 92.407,20.1 93.057,20.1 96.282,23.325 96.973,23.325 97.598,23.95 101.087,23.95 102.087,22.95 106.505,22.95 106.83,23.275 109.775,23.275 115.598,17.452 119.152,17.452 122.573,20.873 122.573,21.218 122.805,21.45 123.434,21.45 v1(124.611,22.626)
I2S1WCLK: DD1.Y6 R184.1 | length 54.1
  Top Layer w0.125: R184.1@73.664,18.861 73.664,19.527 73.894,19.757 v1(73.894,19.831)
  Top Layer w0.2: v1(122.211,21.824) DD1.Y6@122.612,22.225
  Layer 2 w0.125: v1(73.894,19.831) 74.412,20.35 92.989,20.35 96.189,23.55 96.88,23.55 97.505,24.175 101.888,24.175 102.388,23.675 105.886,23.675 106.161,23.95 115.138,23.95 116.1,22.988 116.25,22.988 116.255,22.983 116.817,22.983 119.204,20.596 120.742,20.596 120.976,20.83 120.976,21.102 121.327,21.452 121.635,21.452 121.959,21.777 122.164,21.777 v1(122.211,21.824)
ISO_USB_N: DD15.6 L63.2 VD3.2 | length 8.8
  Top Layer w0.2: v1(22.229,11.425) 22.267,11.463 22.267,11.605 22.279,11.616 VD3.2@22.279,12.106 ; L63.2@23.025,10.25 23.125,10.35 23.4,10.35 23.517,10.467 23.517,10.898 23.869,11.249 24.359,11.249 24.37,11.261 24.512,11.261 v1(24.55,11.299) 24.588,11.261 24.73,11.261 24.741,11.249 25.645,11.249 25.816,11.42 25.816,11.499 26.001,11.684 DD15.6@26.543,11.684
  Layer 3 w0.2: v1(22.229,11.425) 22.267,11.463 22.267,11.605 22.279,11.616 22.279,12.041 22.63,12.392 23.128,12.392 23.707,11.813 23.707,11.642 24.1,11.249 24.359,11.249 24.37,11.261 24.512,11.261 v1(24.55,11.299)
ISO_USB_P: DD15.7 L63.3 VD3.3 | length 8.4
  Top Layer w0.2: VD3.3@22.679,12.106 22.679,11.616 22.691,11.605 22.691,11.463 v1(22.729,11.425) ; L63.3@23.025,9.45 23.2,9.45 23.917,10.167 23.917,10.732 24.034,10.849 24.359,10.849 24.37,10.837 24.512,10.837 v1(24.55,10.799) 24.588,10.837 24.73,10.837 24.741,10.849 25.645,10.849 25.816,10.678 25.816,10.599 26.001,10.414 DD15.7@26.543,10.414
  Layer 3 w0.2: v1(22.729,11.425) 22.691,11.463 22.691,11.605 22.679,11.616 22.679,11.875 22.796,11.992 22.962,11.992 23.307,11.647 23.307,11.477 23.934,10.849 24.359,10.849 24.37,10.837 24.512,10.837 v1(24.55,10.799)
JTAG_TCK: DD1.G11 R21.2 XP2.6 | length 82.3
  Top Layer w0.125: R21.2@62.2,46.4 62.2,43.575 XP2.6@62.95,42.825
  Top Layer w0.2: DD1.G11@126.612,32.625 v1(127.013,33.026)
  Layer 1 w0.125: XP2.6@62.95,42.825 64.363,44.238 78.726,44.238 81.639,47.15 101.805,47.15 102.53,47.875 103.151,47.875 103.288,47.737 103.962,47.737 104.762,48.538 117.815,48.538 120.7,45.652 120.7,42.368 125.3,37.768 125.3,33.35 126.025,32.625 126.612,32.625 v1(127.013,33.026)
JTAG_TDI: DD1.H13 XP2.10 | length 76.2
  Top Layer w0.2: DD1.H13@128.212,31.825 v1(128.613,32.226)
  Layer 1 w0.125: XP2.10@66.95,42.825 67.913,43.787 78.912,43.787 81.825,46.7 103.242,46.7 104.68,48.137 110.351,48.137 110.526,48.313 117.722,48.313 120.475,45.559 120.475,42.275 125.075,37.675 125.075,32.852 126.063,31.864 128.251,31.864 v1(128.613,32.226)
JTAG_TDO: DD1.G14 XP2.8 | length 83.8
  Top Layer w0.2: DD1.G14@129.012,32.625 v1(129.413,33.026)
  Layer 1 w0.125: XP2.8@64.95,42.825 66.138,44.013 78.819,44.013 81.732,46.925 102.267,46.925 v1(102.854,47.512)
  Layer 2 w0.125: v1(102.854,47.512) 102.854,47.587 103.011,47.743 103.011,47.816 103.158,47.963 105.388,47.963 107,49.575 126.023,49.575 127.579,48.018 127.579,47.718 127.225,47.364 127.225,36.2 128.176,35.249 128.176,32.951 128.463,32.664 129.051,32.664 v1(129.413,33.026)
JTAG_TMS: DD1.G12 R20.2 XP2.4 | length 84.4
  Top Layer w0.125: XP2.4@60.95,42.825 61.1,42.975 61.1,44.6 61.175,44.675 R20.2@61.175,46.4
  Top Layer w0.2: DD1.G12@127.412,32.625 v1(127.813,33.026)
  Layer 1 w0.125: XP2.4@60.95,42.825 62.588,44.463 78.633,44.463 81.545,47.375 101.711,47.375 102.436,48.1 103.244,48.1 103.382,47.962 103.868,47.962 104.668,48.763 117.962,48.763 120.925,45.8 120.925,42.461 125.525,37.861 125.525,33.95 126.05,33.425 127.415,33.425 v1(127.813,33.026)
LHP: C356.1 Z4.4 | length 28.7
  Top Layer w0.125: C356.1@86.4,18.8 C356.1@86.525,18.925 ; v3(98.325,11.313) 98.675,10.963 Z4.4@98.675,10.55
  Top Layer w0.3: C356.1@86.525,18.925 v3(87.5,18.925)
  Layer 3 w0.125: v3(87.5,18.925) 97.475,18.925 104.096,12.304 104.096,11.271 103.566,10.741 98.897,10.741 v3(98.325,11.313)
LMICN: C342.1 Z5.2 | length 32.5
  Top Layer w0.125: v1(76.7,19.7) 76.712,19.688 C342.1@76.712,18.825 ; v1(103.675,11.395) 103.675,11.321 103.775,11.22 Z5.2@103.775,10.55
  Layer 3 w0.125: v1(76.7,19.7) 77.213,19.187 77.85,19.187 77.938,19.275 81.157,19.275 81.707,18.725 84.576,18.725 85.064,18.237 87.933,18.237 88.17,18.475 93.282,18.475 100.066,11.691 103.379,11.691 v1(103.675,11.395)
LMICP: C341.1 Z5.1 | length 31.8
  Top Layer w0.125: v1(77.7,19.55) 77.728,19.522 C341.1@77.728,18.825 ; v1(103.733,11.892) 103.808,11.892 103.982,11.717 104.048,11.717 104.189,11.577 104.189,11.241 104.251,11.179 104.251,10.574 Z5.1@104.275,10.55
  Layer 3 w0.125: v1(77.7,19.55) 81.2,19.55 81.8,18.95 84.669,18.95 85.157,18.462 87.84,18.462 88.077,18.7 93.375,18.7 100.159,11.916 103.709,11.916 v1(103.733,11.892)
MIO2: D1.5 DD1.A2 R11.2 | length 12.5
  Top Layer w0.125: D1.5@118.6,40.61 118.679,40.531 118.679,40.271 v1(119.05,39.9) 118.529,39.379 118.529,38.588 119.403,37.714 119.403,37.434 DD1.A2@119.412,37.425 ; v1(121.725,46.5) R11.2@121.725,47.175
  Layer 2 w0.125: v1(119.05,39.9) 119.05,41.827 119.686,42.463 120,42.463 120.362,42.825 120.362,43.139 121.425,44.202 121.425,46.2 v1(121.725,46.5)
MIO3: D1.2 DD1.F6 R19.2 | length 20.4
  Top Layer w0.125: R19.2@109.575,43.5 110.155,43.5 110.61,43.045 D1.2@110.86,43.045 110.865,43.05 v1(111.9,43.05)
  Top Layer w0.2: DD1.F6@122.614,33.423 v1(123.015,33.824)
  Layer 2 w0.125: v1(111.9,43.05) 111.2,42.35 111.2,40.725 112.65,39.275 116.9,39.275 121.911,34.264 122.576,34.264 v1(123.015,33.824)
MIO4: D1.3 DD1.E4 R151.2 | length 18.1
  Top Layer w0.125: R151.2@109.6,42.55 110.085,42.55 110.448,42.188 110.448,41.938 110.61,41.775 D1.3@110.86,41.775 v1(111.975,41.775) ; v1(119.017,38.989) 119.017,38.454 119.8,37.671 119.8,36.489 120.051,36.237 120.348,36.237 120.603,35.982 120.603,35.686 120.858,35.431 121.154,35.431 121.4,35.186 121.4,34.613 DD1.E4@121.012,34.225
  Layer 2 w0.125: v1(111.975,41.775) 111.975,41.701 111.75,41.476 111.75,40.975 112.966,39.759 118.247,39.759 v1(119.017,38.989)